# Altium PCB S.ANALOG-G5-5A.pcbDoc.PcbDoc
Units mil, origin at the board's own origin, x right, y up, seen from the top; angles counter-clockwise.
Board outline 2180 x 1352.5 mil, 2 copper layers (Top Layer, Bottom Layer); 18 components, 15 nets, 56 pads, 7 vias.
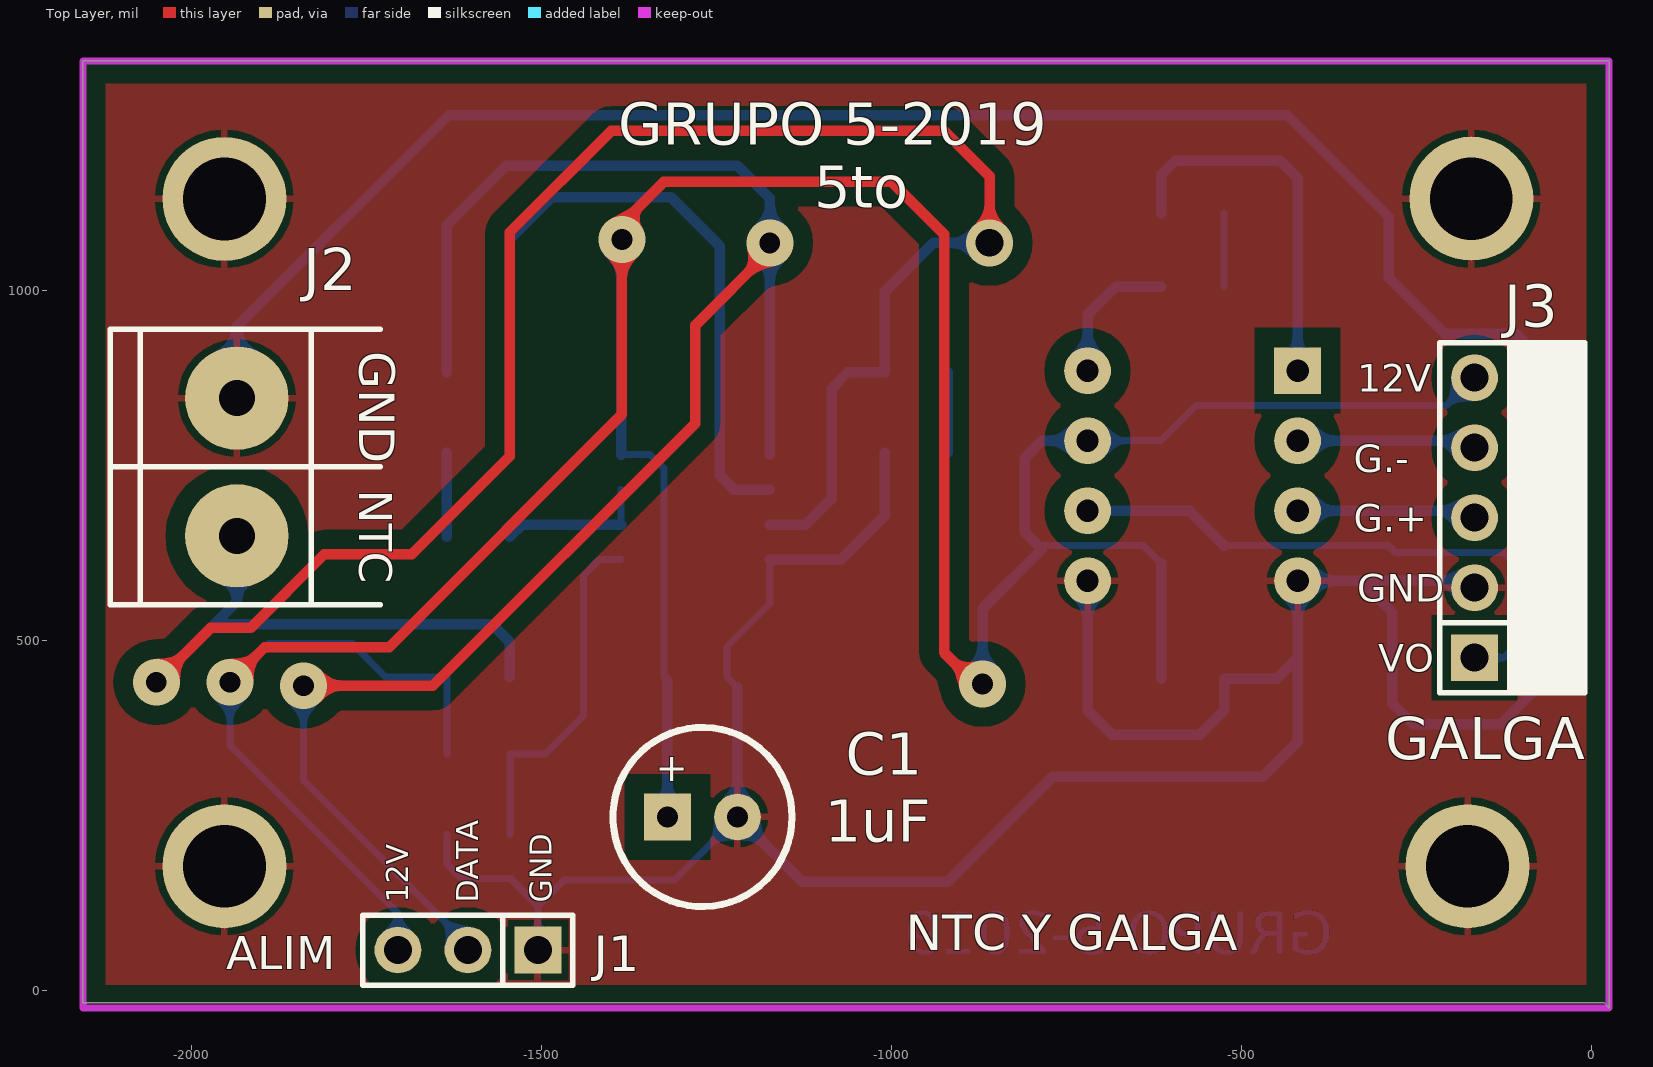
[diagram p0: Top Layer view]
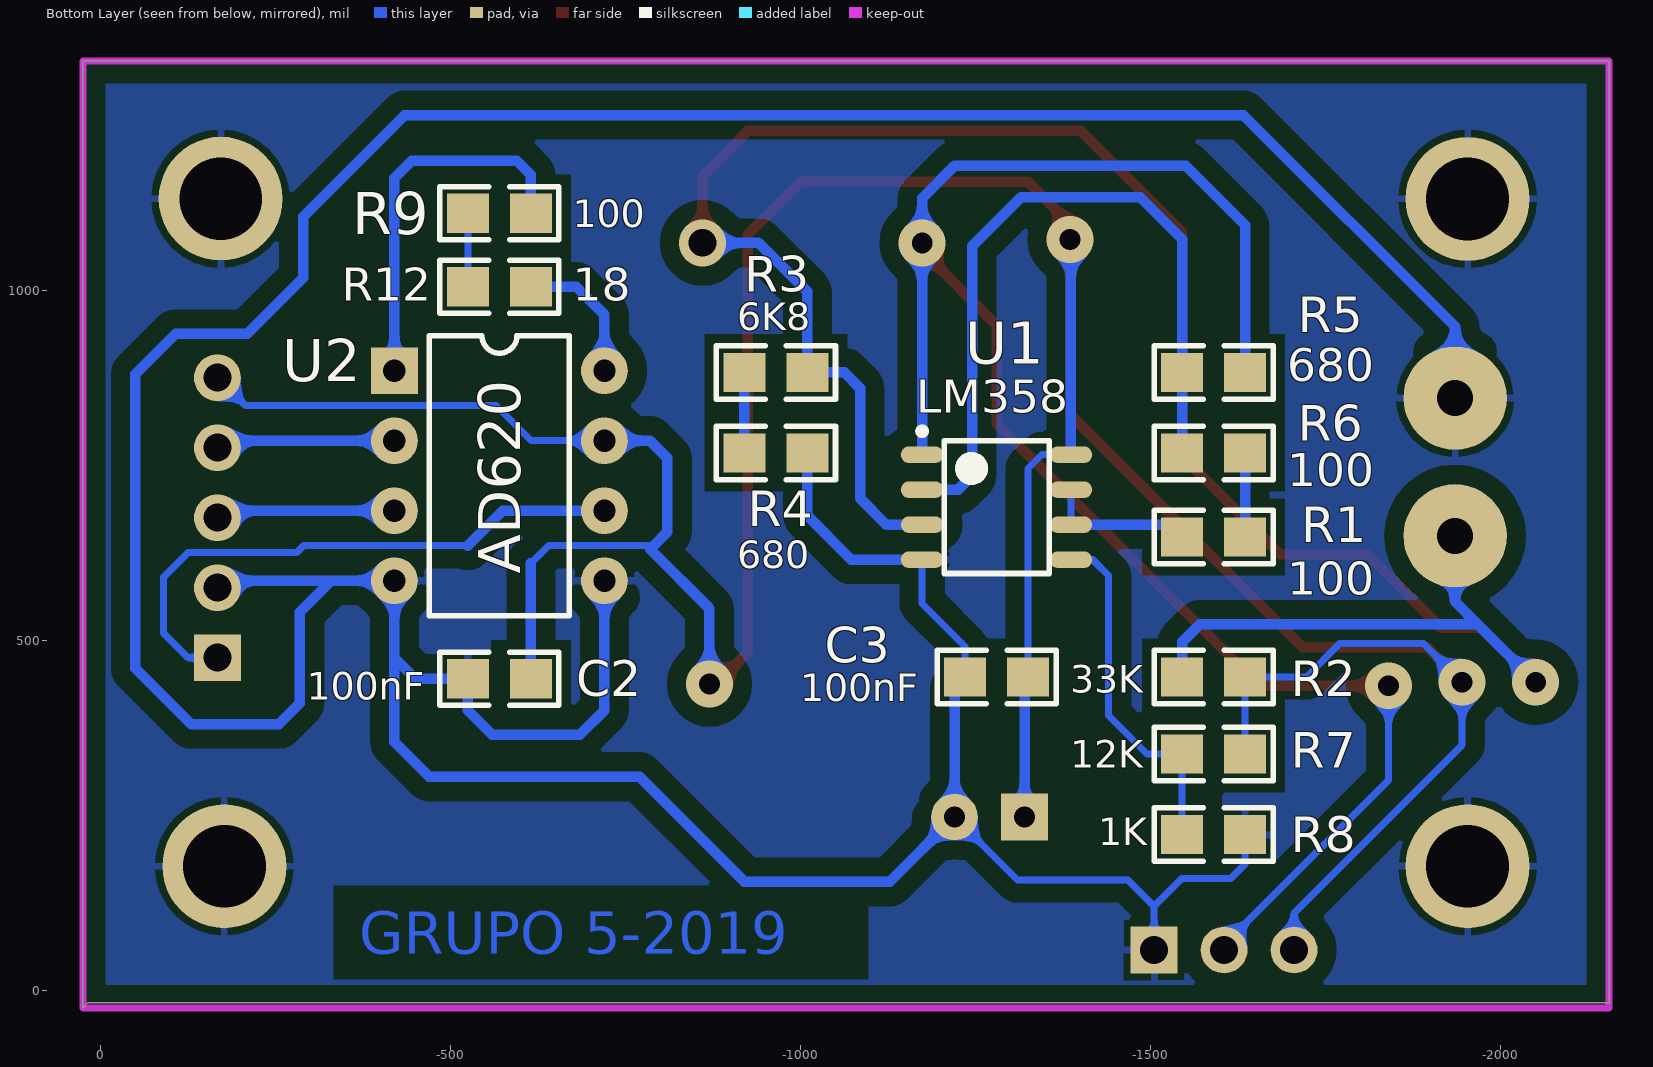
[diagram p1: Bottom Layer view, seen from below]

## Layer stack, top to bottom
Top Solder: solder mask 0.4, Solder Resist, Dk 3.5
Top Layer: signal copper 1.4
Dielectric 1: dielectric 12.6, FR-4, Dk 4.8
Bottom Layer: signal copper 1.4
Bottom Solder: solder mask 0.4, Solder Resist, Dk 3.5

## Board outline
-2155,1327.5 25,1327.5 25,-25 17.5,-17.5 -2155,-17.5

## Design rules (kind name [scope] priority, off if disabled: settings)
Clearance Clearance_polygon [InPolygon] p1: gap=27.56
Clearance [All] p2: gap=10
PolygonConnect [All] p1: connectstyle=Relief reliefconductorwidth=10 reliefentries=4 polygonreliefangle="90 Angle" airgapwidth=10
RoutingVias [All] p1: holewidth=28 width=50 viastyle="Through Hole" minholewidth=28 minwidth=50 maxholewidth=28 maxwidth=50
SolderMaskExpansion [All] p1: expansion=4
UnpouredPolygon [All] p1: allowunpoured=FALSE
Width [All] p1: maxlimit=15 minlimit=10 preferedwidth=10 minimp=50.000000 maximp=50.000000 favimp=50.000000
29 further rules are at their usual default settings.

## Components (designator, comment, footprint, x,y, rotation, side; value= is the part's Value field where it differs from the comment)
C1 "1uF" Capol -1270,247.5 r0 top
C2 "100nF" 0805 -570,445 r0 bottom
C3 "100nF" 0805 -1280,447.5 r0 bottom
J1 "ALIM" SIP3 -1605,57.5 r180 top
J2 "NTC" BORNERA2 -1935,747.5 r0 top
J3 "GALGA" "SIP5 90" -167.2,475 r90 top
R1 "100" 0805 -1590,647.5 r0 bottom
R2 "33K" 0805 -1590,447.5 r180 bottom
R3 "6K8" 0805 -965,882.5 r180 bottom
R4 "680" 0805 -965,767.5 r0 bottom
R5 "680" 0805 -1590,882.5 r0 bottom
R6 "100" 0805 -1590,767.5 r180 bottom
R7 "12K" 0805 -1590,337.5 r180 bottom
R8 "1K" 0805 -1590,222.5 r0 bottom
R9 "100" 0805 -570,1110 r0 bottom
R12 "18" 0805 -570,1005 r180 bottom
U1 "LM358" "LM358 SMD" -1280,690 r180 bottom
U2 "AD620" DIP8 -420,885 r180 bottom

## Footprints (in the part's own frame and the unit in brackets; to place one, negate y for a bottom-side part, rotate by r counter-clockwise, add the part's x,y. Pads: shape width x height; smd on the part's side, far side on the other; paste and mask are expansions set on the pad)
0805 [mil] "Pasivo 0805"
  rect 60x56 smd: 1(-45,0) 2(45,0)
  silkscreen extent -85,-38 85,38, body extent -39,-25 39,25, height 15
BORNERA2 [mm] "Bornera con Tornillos 5mm separaci�n"
  round 3.75 hole 1.3: 1(0,2.5) 2(0,-2.5)
  silkscreen extent -4.6,-5 5.2,5, body extent -3.76,-4.89 3.94,5.61, height 10
Capol [mm] "Body diameter 6.5mm"
  rect 1.7x1.7 hole 0.762: 1(-1.27,0)
  round 1.7 hole 0.762: 2(1.27,0)
  silkscreen extent -3.25,-3.25 3.25,3.25, body extent -3.15,-3.18 3.2,3.18, height 11.53
DIP8 [mm]
  rect 1.7x1.7 hole 0.813: 1(0,0)
  round 1.7 hole 0.813: 2(0,-2.54) 3(0,-5.08) 4(0,-7.62) 5(7.62,-7.62) 6(7.62,-5.08) 7(7.62,-2.54) 8(7.62,0)
  silkscreen extent 1.27,-8.89 6.35,1.27, body extent -0.06,-9.21 7.7,1.59, height 4.5
"LM358 SMD" [mm]
  oval 1.55x0.6 smd: 1(-2.7,1.905) 2(-2.7,0.635) 3(-2.7,-0.635) 4(-2.7,-1.905) 5(2.7,-1.905) 6(2.7,-0.635) 7(2.7,0.635) 8(2.7,1.905)
  silkscreen extent -2.83,-2.4 1.91,2.88, body extent -2,-2.5 2,2.5, height 1.75
SIP3 [mm]
  rect 1.7x1.7 hole 1.016: 1(-2.54,0)
  round 1.7 hole 1.016: 2(0,0) 3(2.54,0)
  silkscreen extent -3.81,-1.27 3.81,1.27, body extent -3.81,-1.3 3.81,1.24, height 8.38
"SIP5 90" [mm]
  rect 1.7x1.7 hole 1.016: 1(0,0)
  round 1.7 hole 1.016: 2(2.54,0) 3(5.08,0) 4(7.62,0) 5(10.16,0)
  silkscreen extent -1.27,-4 11.43,1.27, body extent -1.27,-9.94 11.43,0.29, height 3.76

## Part data
C1: library part CAPPOL, "Cap polarizado"
C2 C3: library part CAP, "cap"
J1: library part CON3
J2: library part "BORNERA 2"
J3: library part CON5
R1 R2 R3 R4 R5 R6 R7 R8 R9 R12: library part RES, "Resistencia"
U2: library part AD623

## Free pads (board coordinates)
  round 177.17 hole 118.11: 0(-1952.83,1130.33) 1(-1952.83,177.17) 2(-177.17,177.17) 3(-171.85,1130.65)

## Via types
v1: diameter 66.93, hole 29.53, Top Layer to Bottom Layer, 6 vias
v2: diameter 66.93, hole 39.37, Top Layer to Bottom Layer, 1 vias

## Nets (pads, with @x,y where several pads share a name; then routed paths per layer and width w, separated by ;. In a path a pad name is that pad's centre, name@x,y a point inside that pad or via, vN(x,y) a via of type N, cw(c..) or ccw(c..) an arc to the next point about the centre after c; other vN are vias at no path point)
DATA: J1.2 R5.1 U1.1 | length 2583.6
  Top Layer w10: v1@-1173.7,1056.3 v1(-1173.7,1067.5)
  Top Layer w15: v1(-1840,435) -1655,435 -1280,810 -1280,950 v1@-1173.7,1056.3
  Bottom Layer w10: v1(-1840,435) -1840,300 -1605,65 J1.2
  Bottom Layer w15: R5.1 -1635,1092.5 -1550,1177.5 -1220,1177.5 -1173.7,1131.2 v1(-1173.7,1067.5) U1.1
GND: C1.2 C2.2 C3.2 J1.1 J2.1 J3.2 pad.0 pad.1 pad.2 pad.3 R4.1 R8.1 U1.4 U2.4 U2.5 | length 6466.5
  Bottom Layer w10: R8.1 -1635,180 -1615,160 -1545,160 -1505,120 ; J1.1 -1505,120 ; C1.2 -1310,157.5 -1467.5,157.5 -1505,120 ; C3.2@-1220,432.5 C3.2 -1235,491.2 -1173.7,552.5 U1.4 ; J3.2@-177.2,585 J3.2
  Bottom Layer w15: J2.1 -1935,947.5 -1632.5,1250 -435,1250 -290,1105 -290,1017.5 -210,937.5 -107.5,937.5 -50,880 -50,460 -130,380 -255,380 -285,410 -285,540 -330,585 ; C3.2@-1220,432.5 C1.2 -1127.5,155 -920,155 -770,305 -470,305 -420,355 -420,475 ; U1.4 -1072.5,615 -1010,677.5 R4.1 ; U2.5 -720,400 -685,365 -560,365 -525,400 C2.2 -450,445 -420,475 ; J3.2@-177.2,585 -330,585 ; -420,475 U2.4 -330,585
NetJ2_2: J2.2 R2.1 R3.2 U1.3 | length 3205.2
  Top Layer w15: v1(-2050,440) -1972.5,517.5 -1915,517.5 -1810,622.5 -1685,622.5 -1545,762.5 -1545,1082.5 -1400,1227.5 -925,1227.5 -860,1162.5 v2(-860,1067.5)
  Bottom Layer w15: v1(-2050,440) -1967.5,522.5 ; J2.2 -1935,555 -1967.5,522.5 ; R2.1 -1545,497.5 -1570,522.5 -1967.5,522.5 ; U1.3 -1122.5,665 -1085,702.5 -1085,860 -1062.5,882.5 R3.2 -1010,997.5 -940,1067.5 v2(-860,1067.5)
NetJ3_3: J3.3 U2.3 | length 256.9
  Bottom Layer w10: J3.3@-177.2,685 J3.3
  Bottom Layer w15: U2.3 J3.3@-177.2,685
NetJ3_4: J3.4 U2.2 | length 256.9
  Bottom Layer w10: J3.4@-177.2,785 J3.4
  Bottom Layer w15: U2.2 J3.4@-177.2,785
NetR1_1: R1.1 R6.2 | length 120
  Bottom Layer w15: R1.1 R6.2
NetR1_2: R1.2 U1.6 U1.7 | length 215.9
  Bottom Layer w10: U1.6 U1.7
  Bottom Layer w15: R1.2 -1527.5,665 U1.6
NetR3_1: R3.1 R4.2 | length 115
  Bottom Layer w15: R4.2 R3.1
NetR5_2: R5.2 R6.1 U1.2 | length 1065.9
  Bottom Layer w15: R6.1 R5.2 -1545,1072.5 -1485,1132.5 -1315,1132.5 -1245,1062.5 -1245,735 -1225,715 U1.2
NetR7_1: R7.1 R8.2 U1.5 | length 505.8
  Bottom Layer w10: R8.2 R7.1 -1495,337.5 -1440,392.5 -1440,592.5 -1417.5,615 U1.5
NetR9_1: R9.1 U2.1 | length 543.6
  Bottom Layer w15: R9.1 -615,1165 -595,1185 -445,1185 -420,1160 U2.1
NetR9_2: R9.2 R12.1 | length 105
  Bottom Layer w10: R12.1 R9.2
NetR12_2: R12.2 U2.8 | length 201.6
  Bottom Layer w15: U2.8 -720,965 -680,1005 R12.2
VCC: C1.1 C2.1 C3.1 J1.3 J3.5 R2.2 R7.2 U1.8 U2.7 | length 5430.1
  Top Layer w10: v1(-1385,1072.5) v1@-1385,1095 ; v1@-880,437.5 v1(-870,437.5)
  Top Layer w15: v1(-1945,440) -1895,490 -1717.5,490 -1385,822.5 v1(-1385,1072.5) ; v1@-1385,1095 -1325,1155 -1000,1155 -925,1080 -925,482.5 v1@-880,437.5
  Bottom Layer w10: J1.3 -1705,110 -1945,350 v1(-1945,440) -1890,495 -1770,495 -1722.5,447.5 R2.2 R7.2 ; U1.8 -1345,765 -1325,745 C3.1 C3.1@-1320,442.5 ; v1@-1386.3,1071.2 v1(-1385,1072.5) ; C1.1@-1340,225 -1325,240 C1.1@-1325,247.5 ; -790.27,635 -640,635 -615,610 ; U2.7 -615,785 -565,835 -207.2,835 J3.5
  Bottom Layer w15: U1.8 v1@-1386.3,1071.2 ; C1.1 C3.1@-1320,442.5 ; v1(-870,437.5) -870,545.27 -785.27,630 ; -790.27,635 -810,654.73 -810,760 -785,785 U2.7 ; C2.1 -615,610
VO: J3.1 U2.6 | length 806.1
  Bottom Layer w10: -525,635 -290,635 -280,625 -125,625 -90,590 -90,510 -125,475 J3.1
  Bottom Layer w15: -685,685 -575,685 -525,635

## Polygon pours and split planes (outlines as drawn)
GND on Top Layer "polygon1" (solid, remove dead copper, pour order 6): -2160,1335 -2160,-12.5 -2155,-17.5 -2147.5,-25 20,-25 20,1322.5 15,1327.5
GND on Bottom Layer "polygon1" (solid, remove dead copper, pour order 8): -2155,1327.5 -2155,-20 35,-20 25,-10 25,1327.5

## Keep-outs
Keep-Out Layer:
  lines w10: 25,-25 25,260 25,1327.5 -1337.5,1327.5 -2155,1327.5 -2155,580 -2155,-25 25,-25 ; 25,-25 25,-25

## Other copper
Bottom Layer:
  text "GRUPO 5-2019" at -370,52.5 h60

## Silkscreen, mask and mechanical layers (free items; w line width, h text height)
Top Overlay:
  text "GRUPO 5-2019" at -1390,1207.5 h60
  text "5to" at -1110,1117.5 h60
  text "GND" at -1760,912.5 h51.18 r270
  text "12V" at -335,855 h39.37
  text "G.-" at -340,740 h39.37
  text "G.+" at -340,655 h39.37
  text "GND" at -335,555 h39.37
  text "VO" at -305,455 h39.37
  text "12V" at -1690,125 h31.5 r90
  text "DATA" at -1590,125 h31.5 r90
  text "GND" at -1485,125 h31.5 r90
  text "NTC Y GALGA" at -980,57.5 h51.18
Mechanical 15:
  lines w10: -2130,0 -2130,1307.5 0,1307.5 0,0 -2130,0

## Text inside footprints (layer, text, board x,y; h text height)
C1: Top Overlay "+" at -1337,298.5 h40